# Altium PCB HM-13.PcbDoc
Units mil, origin at the board's own origin, x right, y up, seen from the top; angles counter-clockwise.
Board outline 3182 x 4045 mil, 2 copper layers (Top Layer, Bottom Layer); 120 components, 8 nets, 412 pads, 260 vias.
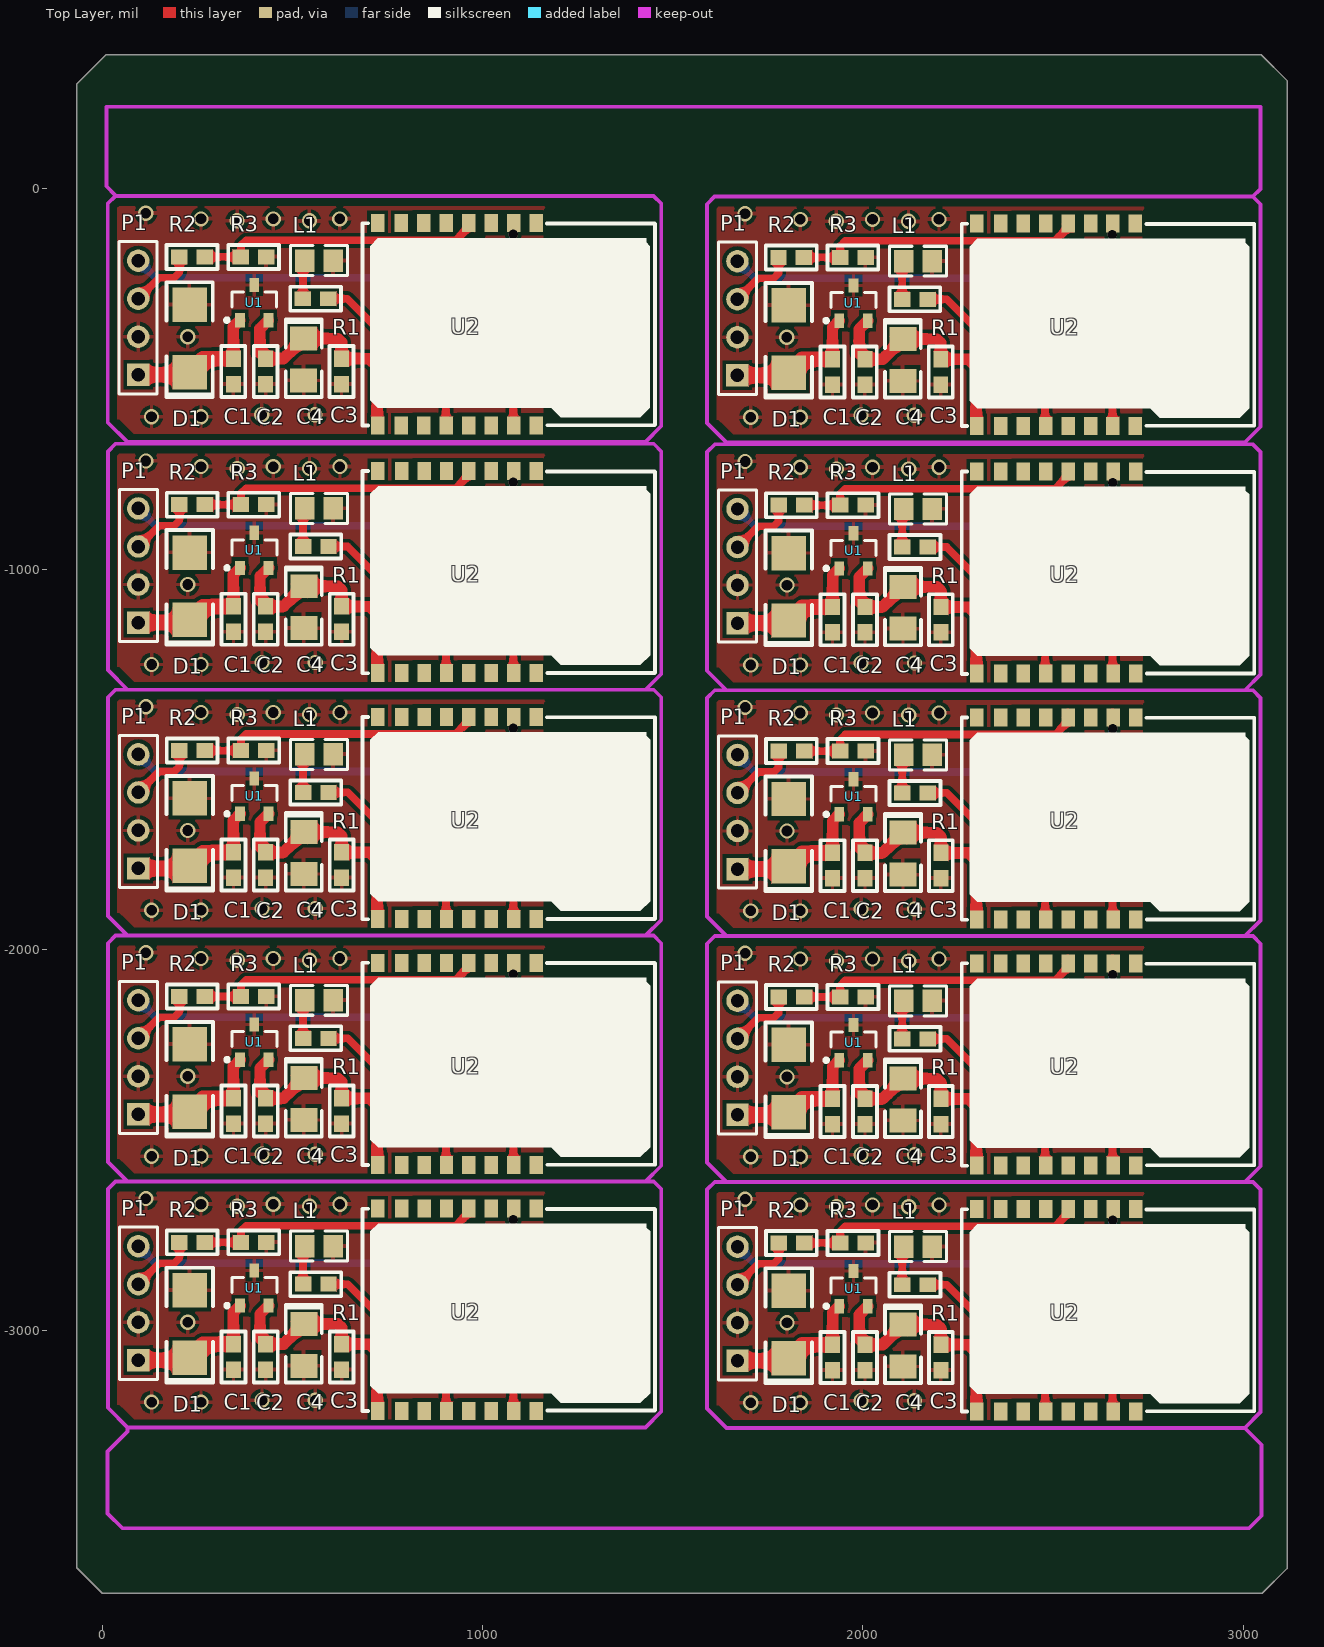
[diagram p0: Top Layer view]
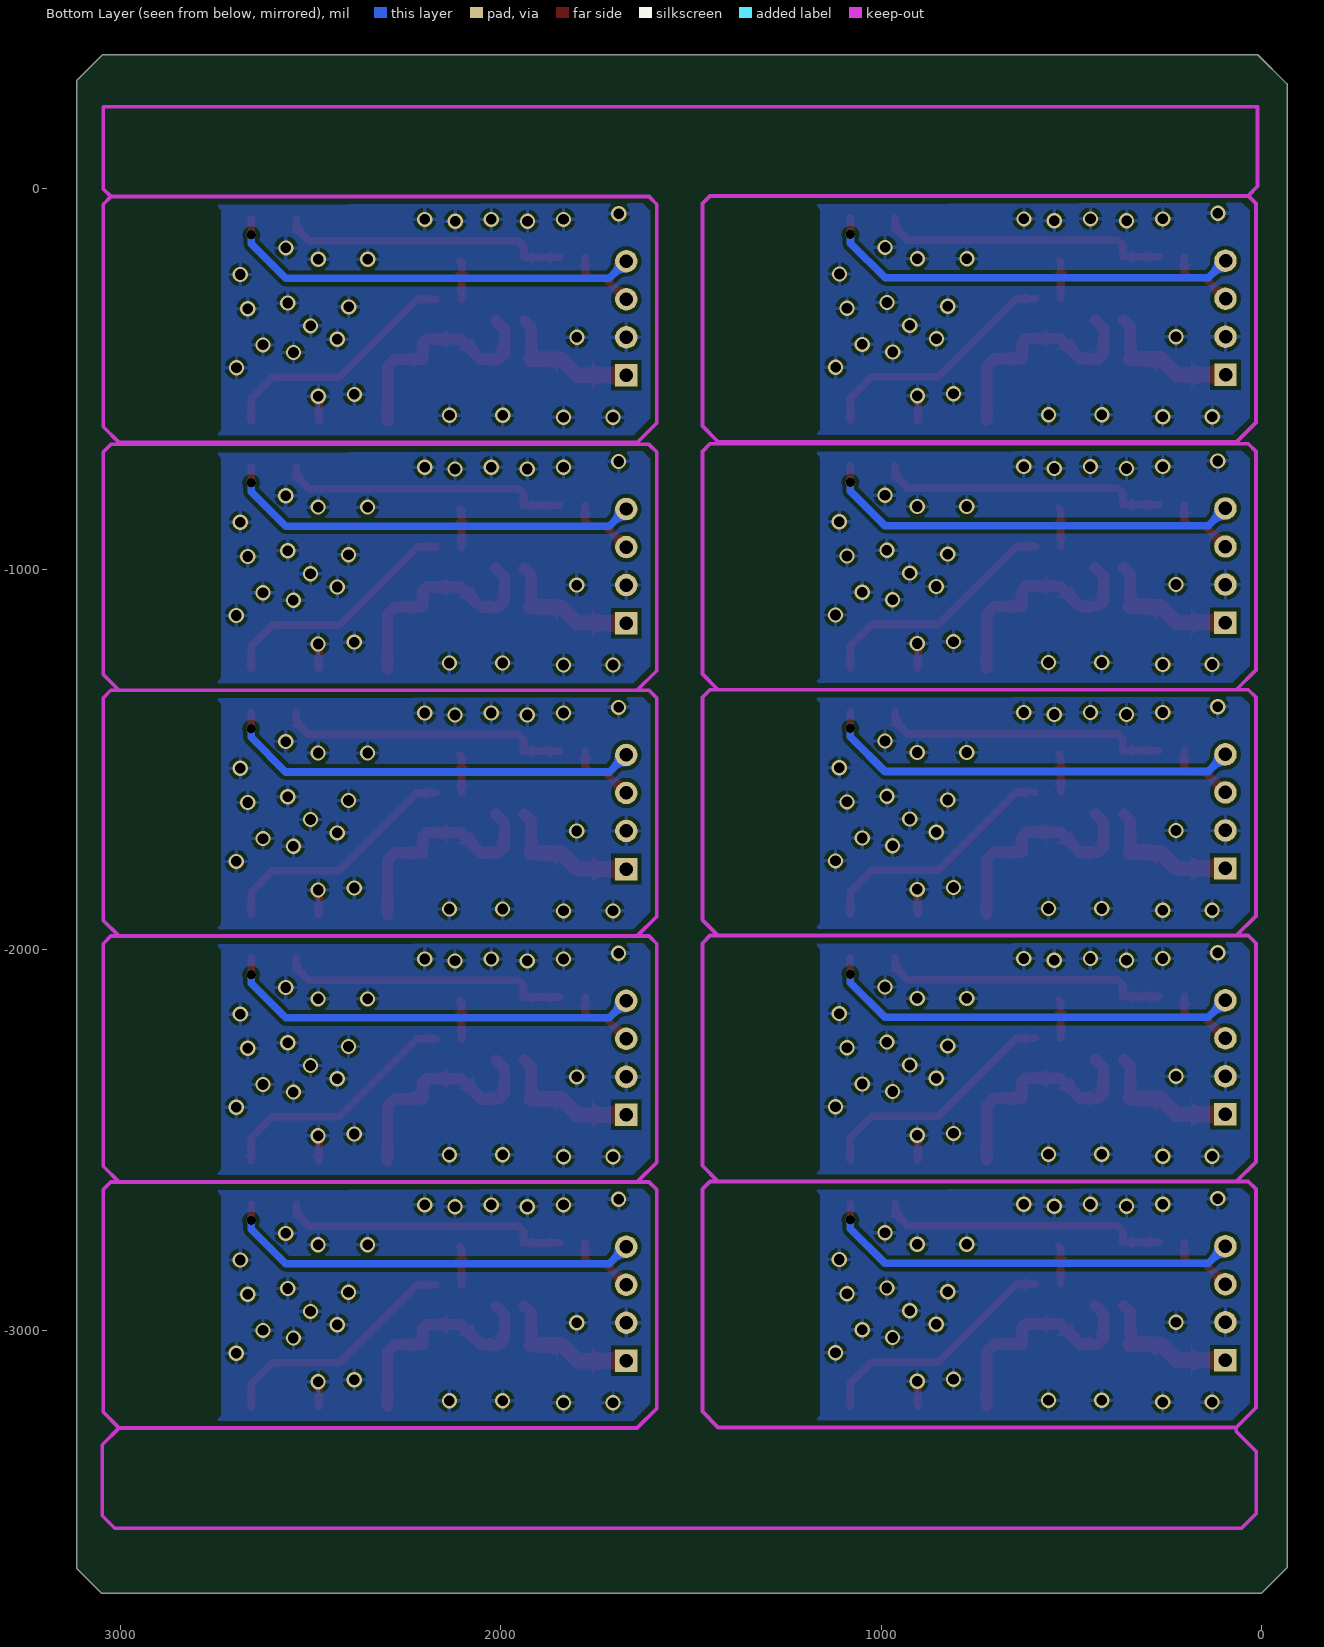
[diagram p1: Bottom Layer view, seen from below]

## Layer stack, top to bottom
Top Solder: solder mask 0.4, Solder Resist, Dk 3.5
Top Layer: signal copper 1.4
Dielectric 1: dielectric 12.6, FR-4, Dk 4.8
Bottom Layer: signal copper 1.4
Bottom Solder: solder mask 0.4, Solder Resist, Dk 3.5

## Board outline
-67,-3625 0,-3692 3050,-3692 3115,-3627 3115,285 3047,353 10,353 -67,276

## Design rules (kind name [scope] priority, off if disabled: settings)
Clearance [All] p1: gap=10
PolygonConnect [All] p1: connectstyle=Relief reliefconductorwidth=10 reliefentries=4 polygonreliefangle="90 Angle" airgapwidth=10
RoutingVias [All] p1: holewidth=28 width=40 viastyle="Through Hole" minholewidth=25 minwidth=15 maxholewidth=28 maxwidth=40
SolderMaskExpansion [All] p1: expansion=4
Width [All] p1: maxlimit=40 minlimit=10 preferedwidth=20
30 further rules are at their usual default settings.

## Components (designator, comment, footprint, x,y, rotation, side; value= is the part's Value field where it differs from the comment)
C1 "1uF" 0603 1920.39,-481.1 r90 top
C1 "1uF" 0603 345.16,-479.71 r90 top
C1 "1uF" 0603 345.39,-1131.1 r90 top
C1 "1uF" 0603 1920.63,-1132.5 r90 top
C1 "1uF" 0603 345.39,-1777.56 r90 top
C1 "1uF" 0603 1920.63,-1778.96 r90 top
C1 "1uF" 0603 345.39,-2424.02 r90 top
C1 "1uF" 0603 1920.63,-2425.41 r90 top
C1 "1uF" 0603 345.39,-3070.47 r90 top
C1 "1uF" 0603 1920.63,-3071.87 r90 top
C2 "1uF" 0603 2005.39,-481.1 r90 top
C2 "1uF" 0603 430.16,-479.71 r90 top
C2 "1uF" 0603 430.39,-1131.1 r90 top
C2 "1uF" 0603 2005.63,-1132.5 r90 top
C2 "1uF" 0603 430.39,-1777.56 r90 top
C2 "1uF" 0603 2005.63,-1778.96 r90 top
C2 "1uF" 0603 430.39,-2424.02 r90 top
C2 "1uF" 0603 2005.63,-2425.41 r90 top
C2 "1uF" 0603 430.39,-3070.47 r90 top
C2 "1uF" 0603 2005.63,-3071.87 r90 top
C3 "0.1uF" 0603 2205,-481.1 r90 top
C3 "0.1uF" 0603 629.77,-479.71 r90 top
C3 "0.1uF" 0603 630,-1131.1 r90 top
C3 "0.1uF" 0603 2205.23,-1132.5 r90 top
C3 "0.1uF" 0603 630,-1777.56 r90 top
C3 "0.1uF" 0603 2205.23,-1778.96 r90 top
C3 "0.1uF" 0603 630,-2424.02 r90 top
C3 "0.1uF" 0603 2205.23,-2425.41 r90 top
C3 "0.1uF" 0603 630,-3070.47 r90 top
C3 "0.1uF" 0603 2205.23,-3071.87 r90 top
C4 "10uF/16V" 1206 2105,-450 r270 top
C4 "10uF/16V" 1206 529.77,-448.6 r270 top
C4 "10uF/16V" 1206 530,-1100 r270 top
C4 "10uF/16V" 1206 2105.23,-1101.4 r270 top
C4 "10uF/16V" 1206 530,-1746.46 r270 top
C4 "10uF/16V" 1206 2105.23,-1747.85 r270 top
C4 "10uF/16V" 1206 530,-2392.91 r270 top
C4 "10uF/16V" 1206 2105.23,-2394.31 r270 top
C4 "10uF/16V" 1206 530,-3039.37 r270 top
C4 "10uF/16V" 1206 2105.23,-3040.77 r270 top
D1 "TVS" DO214-AC 1805,-394.49 r270 top
D1 "TVS" DO214-AC 229.77,-393.09 r270 top
D1 "TVS" DO214-AC 230,-1044.49 r270 top
D1 "TVS" DO214-AC 1805.23,-1045.88 r270 top
D1 "TVS" DO214-AC 230,-1690.94 r270 top
D1 "TVS" DO214-AC 1805.23,-1692.34 r270 top
D1 "TVS" DO214-AC 230,-2337.4 r270 top
D1 "TVS" DO214-AC 1805.23,-2338.8 r270 top
D1 "TVS" DO214-AC 230,-2983.86 r270 top
D1 "TVS" DO214-AC 1805.23,-2985.25 r270 top
L1 "LED" 0805 2145,-190 r0 top
L1 "LED" 0805 569.77,-188.6 r0 top
L1 "LED" 0805 570,-840 r0 top
L1 "LED" 0805 2145.23,-841.4 r0 top
L1 "LED" 0805 570,-1486.46 r0 top
L1 "LED" 0805 2145.23,-1487.85 r0 top
L1 "LED" 0805 570,-2132.91 r0 top
L1 "LED" 0805 2145.23,-2134.31 r0 top
L1 "LED" 0805 570,-2779.37 r0 top
L1 "LED" 0805 2145.23,-2780.77 r0 top
P1 "Header 4" HDR1X4 1670,-490 r90 top
P1 "Header 4" HDR1X4 94.77,-488.6 r90 top
P1 "Header 4" HDR1X4 95,-1140 r90 top
P1 "Header 4" HDR1X4 1670.23,-1141.4 r90 top
P1 "Header 4" HDR1X4 95,-1786.46 r90 top
P1 "Header 4" HDR1X4 1670.23,-1787.85 r90 top
P1 "Header 4" HDR1X4 95,-2432.91 r90 top
P1 "Header 4" HDR1X4 1670.23,-2434.31 r90 top
P1 "Header 4" HDR1X4 95,-3079.37 r90 top
P1 "Header 4" HDR1X4 1670.23,-3080.77 r90 top
R1 "470" 0603 2136.54,-289.61 r180 top
R1 "470" 0603 561.3,-288.21 r180 top
R1 "470" 0603 561.54,-939.61 r180 top
R1 "470" 0603 2136.77,-941 r180 top
R1 "470" 0603 561.54,-1586.06 r180 top
R1 "470" 0603 2136.77,-1587.46 r180 top
R1 "470" 0603 561.54,-2232.52 r180 top
R1 "470" 0603 2136.77,-2233.92 r180 top
R1 "470" 0603 561.54,-2878.98 r180 top
R1 "470" 0603 2136.77,-2880.37 r180 top
R2 "2.2K" 0603 1811.54,-179.61 r180 top
R2 "2.2K" 0603 236.3,-178.21 r180 top
R2 "2.2K" 0603 236.54,-829.61 r180 top
R2 "2.2K" 0603 1811.77,-831 r180 top
R2 "2.2K" 0603 236.54,-1476.06 r180 top
R2 "2.2K" 0603 1811.77,-1477.46 r180 top
R2 "2.2K" 0603 236.54,-2122.52 r180 top
R2 "2.2K" 0603 1811.77,-2123.92 r180 top
R2 "2.2K" 0603 236.54,-2768.98 r180 top
R2 "2.2K" 0603 1811.77,-2770.37 r180 top
R3 "4.7K" 0603 1973.46,-179.61 r180 top
R3 "4.7K" 0603 398.23,-178.21 r180 top
R3 "4.7K" 0603 398.46,-829.61 r180 top
R3 "4.7K" 0603 1973.7,-831 r180 top
R3 "4.7K" 0603 398.46,-1476.06 r180 top
R3 "4.7K" 0603 1973.7,-1477.46 r180 top
R3 "4.7K" 0603 398.46,-2122.52 r180 top
R3 "4.7K" 0603 1973.7,-2123.92 r180 top
R3 "4.7K" 0603 398.46,-2768.98 r180 top
R3 "4.7K" 0603 1973.7,-2770.37 r180 top
U1 "AP7313" AP7313-33SAG-7 1975,-300 r90 top
U1 "AP7313" AP7313-33SAG-7 399.77,-298.6 r90 top
U1 "AP7313" AP7313-33SAG-7 400,-950 r90 top
U1 "AP7313" AP7313-33SAG-7 1975.23,-951.4 r90 top
U1 "AP7313" AP7313-33SAG-7 400,-1596.46 r90 top
U1 "AP7313" AP7313-33SAG-7 1975.23,-1597.85 r90 top
U1 "AP7313" AP7313-33SAG-7 400,-2242.91 r90 top
U1 "AP7313" AP7313-33SAG-7 1975.23,-2244.31 r90 top
U1 "AP7313" AP7313-33SAG-7 400,-2889.37 r90 top
U1 "AP7313" AP7313-33SAG-7 1975.23,-2890.77 r90 top
U2 "HM-13" HM-13 2259.76,-91.4 r270 top
U2 "HM-13" HM-13 684.53,-90 r270 top
U2 "HM-13" HM-13 684.76,-741.4 r270 top
U2 "HM-13" HM-13 2260,-742.79 r270 top
U2 "HM-13" HM-13 684.76,-1387.85 r270 top
U2 "HM-13" HM-13 2260,-1389.25 r270 top
U2 "HM-13" HM-13 684.76,-2034.31 r270 top
U2 "HM-13" HM-13 2260,-2035.71 r270 top
U2 "HM-13" HM-13 684.76,-2680.77 r270 top
U2 "HM-13" HM-13 2260,-2682.16 r270 top

## Footprints (in the part's own frame and the unit in brackets; to place one, negate y for a bottom-side part, rotate by r counter-clockwise, add the part's x,y. Pads: shape width x height; smd on the part's side, far side on the other; paste and mask are expansions set on the pad)
0603 [mm]
  rect 1.1x1 smd: 1(-0.85,0.01) 2(0.85,0.01)
  silkscreen extent -1.7,-0.79 1.7,0.81
0805 [mm]
  rect 1.3x1.5 smd: 1(-0.95,0) 2(0.95,0)
  silkscreen extent -1.9,-1 1.9,1
1206 [mm]
  rect 1.6x1.8 smd: 1(-1.41,0) 2(1.39,0)
  silkscreen extent -2.68,-1.2 2.49,1.2
AP7313-33SAG-7 [mm] "SOT23, 3-Leads, Body 2.90x2.40mm, Pitch 0.95mm, IPC Medium Density"
  rect 0.95x0.65 smd: 1(-1.175,0.95) 2(-1.175,-0.95) 3(1.175,0)
  silkscreen extent -1.3,-1.5 0.7,1.95
DO214-AC [mm]
  rect 2.3x2.3 smd: 1(-2.25,0) 2(2.25,0)
  silkscreen extent -3.75,-1.55 3.9,1.55
HDR1X4 [mm] "Connector; Header; 4 Position"
  rect 1.5x1.5 hole 0.9: 1(0,0)
  round 1.5 hole 0.9: 2(2.54,0) 3(5.08,0) 4(7.62,0)
  silkscreen extent -1.27,-1.27 8.89,1.27
HM-13 [mm]
  rect 1.2x0.9 smd: 1(0,11.6) 2(0,10.1) 3(0,8.6) 4(0,7.1) 5(0,5.6) 6(0,4.1) 7(0,2.6) 8(0,1) 9(13.5,1) 10(13.5,2.6) 11(13.5,4.1) 12(13.5,5.6) 13(13.5,7.1) 14(13.5,8.6) 15(13.5,10.1) 16(13.5,11.6)
  silkscreen extent 0,0 13.51,19.53

## Part data
C1 C1 C1 C1 C1 C1 C1 C1 C1 C1 C2 C2 C2 C2 C2 C2 C2 C2 C2 C2 C3 C3 C3 C3 C3 C3 C3 C3 C3 C3: library part Cap1, "ceramic"
C4 C4 C4 C4 C4 C4 C4 C4 C4 C4: library part Cap3, "aluminum"
D1 D1 D1 D1 D1 D1 D1 D1 D1 D1: library part 6V8A-TVS
P1 P1 P1 P1 P1 P1 P1 P1 P1 P1: "Header, 4-Pin"
R1 R1 R1 R1 R1 R1 R1 R1 R1 R1 R2 R2 R2 R2 R2 R2 R2 R2 R2 R2 R3 R3 R3 R3 R3 R3 R3 R3 R3 R3: library part Res
U1 U1 U1 U1 U1 U1 U1 U1 U1 U1: library part AP7313-33SAG-7

## Free pads (board coordinates)
  round 60 on Keep-Out: 0(120,164) 1(2923,-3446)

## Via types
v1: diameter 40, hole 28, Top Layer to Bottom Layer, 250 vias
v2: diameter 25, hole 25, Top Layer to Bottom Layer, 10 vias

## Nets (pads, with @x,y where several pads share a name; then routed paths per layer and width w, separated by ;. In a path a pad name is that pad's centre, name@x,y a point inside that pad or via, vN(x,y) a via of type N, cw(c..) or ccw(c..) an arc to the next point about the centre after c; other vN are vias at no path point)
3.3V: C2.2@429.77,-446.24 C3.2@629.37,-446.24 C4.1@529.77,-393.09 U1.2@437.17,-344.86 U2.9@723.9,-621.5 | length 629.4
  Top Layer w30: U1.2@437.17,-344.86 414.77,-367.26 414.77,-431.24 429.77,-446.24 476.62,-446.24 529.77,-393.09 619.25,-393.09 629.37,-403.21 629.37,-446.24 702.4,-446.24 722.44,-466.28 U2.9@722.44,-608.6
5V: C1.2@344.77,-446.24 D1.2@229.77,-481.67 P1.1@94.77,-488.6 U1.1@362.36,-344.86 | length 376.2
  Top Layer w30: C1.2@344.77,-446.24 344.77,-362.46 U1.1@362.36,-344.86
  Top Layer w40: P1.1@94.77,-488.6 222.83,-488.6 229.77,-481.67 265.2,-446.24 C1.2@344.77,-446.24
GND: C1.1@344.77,-513.17 C2.1@429.77,-513.17 C3.1@629.37,-513.17 C4.2@529.77,-503.33 D1.1@229.77,-304.51 L1.2@607.17,-188.6 P1.2@94.77,-388.6 R3.1@431.69,-178.6 U1.3@399.77,-252.34 U2.12@905,-621.5 | length 65.5
  Top Layer w20: U2.12@903.54,-608.6 903.54,-544.82 v1(904.77,-543.6)
  other v1: 129.77,-598.6 259.77,-598.6 419.77,-593.6 559.77,-593.6 809.77,-538.6 1119.77,-468.6 969.77,-428.6 1049.77,-408.6 854.77,-393.6 224.77,-388.6 924.77,-358.6 1089.77,-313.6 824.77,-308.6 984.77,-298.6 1109.77,-223.6 774.77,-183.6 904.77,-183.6 989.77,-153.6 354.77,-83.6 544.77,-83.6 259.77,-78.6 449.77,-78.6 624.77,-78.6 114.77,-63.6
NetL1_1: L1.1@532.36,-188.6 R1.2@527.84,-288.6 | length 101.9
  Top Layer w20: R1.2@527.84,-288.6 527.84,-193.13 L1.1@532.36,-188.6
NetR1_1: R1.1@594.77,-288.6 U2.15@1082.17,-621.5 | length 653.1
  Top Layer w20: R1.1@594.77,-288.6 644.77,-288.6 849.77,-493.6 1024.77,-493.6 1080.71,-549.55 U2.15@1080.71,-608.6
NetR2_1: R2.1@269.77,-178.6 R3.2@364.77,-178.6 U2.4@964.06,-90 | length 767
  Top Layer w20: R2.1@269.77,-178.6 364.77,-178.6 364.77,-148.6 378.37,-135 929.62,-135 962.6,-102.02 U2.4@962.6,-77.11
RX: P1.3@94.77,-288.6 R2.2@202.84,-178.6 | length 178.2
  Top Layer w20: P1.3@94.77,-288.6 149.77,-233.6 189.77,-233.6 202.84,-220.53 R2.2@202.84,-178.6
TX: P1.4@94.77,-188.6 U2.2@1082.17,-90 | length 1107.8
  Top Layer w20: v2(1080.71,-119.55) U2.2@1080.71,-77.11
  Bottom Layer w20: P1.4@94.77,-188.6 139.77,-233.6 989.77,-233.6 1080.71,-142.66 v2(1080.71,-119.55)
pads on no net: C1.1@345,-1164.57 C1.1@345,-1811.02 C1.1@345,-2457.48 C1.1@345,-3103.94 C1.1@1920,-514.57 C1.1@1920.23,-1165.96 C1.1@1920.23,-1812.42 C1.1@1920.23,-2458.88 C1.1@1920.23,-3105.33 C1.2@345,-1097.64 C1.2@345,-1744.09 C1.2@345,-2390.55 C1.2@345,-3037.01 C1.2@1920,-447.64 C1.2@1920.23,-1099.03 C1.2@1920.23,-1745.49 C1.2@1920.23,-2391.95 C1.2@1920.23,-3038.4 C2.1@430,-1164.57 C2.1@430,-1811.02 C2.1@430,-2457.48 C2.1@430,-3103.94 C2.1@2005,-514.57 C2.1@2005.23,-1165.96 C2.1@2005.23,-1812.42 C2.1@2005.23,-2458.88 C2.1@2005.23,-3105.33 C2.2@430,-1097.64 C2.2@430,-1744.09 C2.2@430,-2390.55 C2.2@430,-3037.01 C2.2@2005,-447.64 C2.2@2005.23,-1099.03 C2.2@2005.23,-1745.49 C2.2@2005.23,-2391.95 C2.2@2005.23,-3038.4 C3.1@629.61,-1164.57 C3.1@629.61,-1811.02 C3.1@629.61,-2457.48 C3.1@629.61,-3103.94 C3.1@2204.61,-514.57 C3.1@2204.84,-1165.96 C3.1@2204.84,-1812.42 C3.1@2204.84,-2458.88 C3.1@2204.84,-3105.33 C3.2@629.61,-1097.64 C3.2@629.61,-1744.09 C3.2@629.61,-2390.55 C3.2@629.61,-3037.01 C3.2@2204.61,-447.64 C3.2@2204.84,-1099.03 C3.2@2204.84,-1745.49 C3.2@2204.84,-2391.95 C3.2@2204.84,-3038.4 C4.1@530,-1044.49 C4.1@530,-1690.94 C4.1@530,-2337.4 C4.1@530,-2983.86 C4.1@2105,-394.49 C4.1@2105.23,-1045.88 C4.1@2105.23,-1692.34 C4.1@2105.23,-2338.8 C4.1@2105.23,-2985.25 C4.2@530,-1154.72 C4.2@530,-1801.18 C4.2@530,-2447.64 C4.2@530,-3094.09 C4.2@2105,-504.72 C4.2@2105.23,-1156.12 C4.2@2105.23,-1802.58 C4.2@2105.23,-2449.03 C4.2@2105.23,-3095.49 D1.1@230,-955.91 D1.1@230,-1602.36 D1.1@230,-2248.82 D1.1@230,-2895.28 D1.1@1805,-305.91 D1.1@1805.23,-957.3 D1.1@1805.23,-1603.76 D1.1@1805.23,-2250.22 D1.1@1805.23,-2896.67 D1.2@230,-1133.07 D1.2@230,-1779.53 D1.2@230,-2425.98 D1.2@230,-3072.44 D1.2@1805,-483.07 D1.2@1805.23,-1134.47 D1.2@1805.23,-1780.92 D1.2@1805.23,-2427.38 D1.2@1805.23,-3073.84 L1.1@532.6,-840 L1.1@532.6,-1486.46 L1.1@532.6,-2132.91 L1.1@532.6,-2779.37 L1.1@2107.6,-190 L1.1@2107.83,-841.4 L1.1@2107.83,-1487.85 L1.1@2107.83,-2134.31 L1.1@2107.83,-2780.77 L1.2@607.4,-840 L1.2@607.4,-1486.46 L1.2@607.4,-2132.91 L1.2@607.4,-2779.37 L1.2@2182.4,-190 L1.2@2182.64,-841.4 L1.2@2182.64,-1487.85 L1.2@2182.64,-2134.31 L1.2@2182.64,-2780.77 P1.1@95,-1140 P1.1@95,-1786.46 P1.1@95,-2432.91 P1.1@95,-3079.37 P1.1@1670,-490 P1.1@1670.23,-1141.4 P1.1@1670.23,-1787.85 P1.1@1670.23,-2434.31 P1.1@1670.23,-3080.77 P1.2@95,-1040 P1.2@95,-1686.46 P1.2@95,-2332.91 P1.2@95,-2979.37 P1.2@1670,-390 P1.2@1670.23,-1041.4 P1.2@1670.23,-1687.85 P1.2@1670.23,-2334.31 P1.2@1670.23,-2980.77 P1.3@95,-940 P1.3@95,-1586.46 P1.3@95,-2232.91 P1.3@95,-2879.37 P1.3@1670,-290 P1.3@1670.23,-941.4 P1.3@1670.23,-1587.85 P1.3@1670.23,-2234.31 P1.3@1670.23,-2880.77 P1.4@95,-840 P1.4@95,-1486.46 P1.4@95,-2132.91 P1.4@95,-2779.37 P1.4@1670,-190 P1.4@1670.23,-841.4 P1.4@1670.23,-1487.85 P1.4@1670.23,-2134.31 P1.4@1670.23,-2780.77 R1.1@595,-940 R1.1@595,-1586.46 R1.1@595,-2232.91 R1.1@595,-2879.37 R1.1@2170,-290 R1.1@2170.23,-941.4 R1.1@2170.23,-1587.85 R1.1@2170.23,-2234.31 R1.1@2170.23,-2880.77 R1.2@528.07,-940 R1.2@528.07,-1586.46 R1.2@528.07,-2232.91 R1.2@528.07,-2879.37 R1.2@2103.07,-290 R1.2@2103.31,-941.4 R1.2@2103.31,-1587.85 R1.2@2103.31,-2234.31 R1.2@2103.31,-2880.77 R2.1@270,-830 R2.1@270,-1476.46 R2.1@270,-2122.91 R2.1@270,-2769.37 R2.1@1845,-180 R2.1@1845.23,-831.4 R2.1@1845.23,-1477.85 R2.1@1845.23,-2124.31 R2.1@1845.23,-2770.77 R2.2@203.07,-830 R2.2@203.07,-1476.46 R2.2@203.07,-2122.91 R2.2@203.07,-2769.37 R2.2@1778.07,-180 R2.2@1778.31,-831.4 R2.2@1778.31,-1477.85 R2.2@1778.31,-2124.31 R2.2@1778.31,-2770.77 R3.1@431.93,-830 R3.1@431.93,-1476.46 R3.1@431.93,-2122.91 R3.1@431.93,-2769.37 R3.1@2006.93,-180 R3.1@2007.16,-831.4 R3.1@2007.16,-1477.85 R3.1@2007.16,-2124.31 R3.1@2007.16,-2770.77 R3.2@365,-830 R3.2@365,-1476.46 R3.2@365,-2122.91 R3.2@365,-2769.37 R3.2@1940,-180 R3.2@1940.23,-831.4 R3.2@1940.23,-1477.85 R3.2@1940.23,-2124.31 R3.2@1940.23,-2770.77 U1.1@362.6,-996.26 U1.1@362.6,-1642.72 U1.1@362.6,-2289.17 U1.1@362.6,-2935.63 U1.1@1937.6,-346.26 U1.1@1937.83,-997.66 U1.1@1937.83,-1644.11 U1.1@1937.83,-2290.57 U1.1@1937.83,-2937.03 U1.2@437.4,-996.26 U1.2@437.4,-1642.72 U1.2@437.4,-2289.17 U1.2@437.4,-2935.63 U1.2@2012.4,-346.26 U1.2@2012.64,-997.66 U1.2@2012.64,-1644.11 U1.2@2012.64,-2290.57 U1.2@2012.64,-2937.03 U1.3@400,-903.74 U1.3@400,-1550.2 U1.3@400,-2196.65 U1.3@400,-2843.11 U1.3@1975,-253.74 U1.3@1975.23,-905.14 U1.3@1975.23,-1551.59 U1.3@1975.23,-2198.05 U1.3@1975.23,-2844.51 U2.1 U2.2@1082.4,-741.4 U2.2@1082.4,-1387.85 U2.2@1082.4,-2034.31 U2.2@1082.4,-2680.77 U2.2@2657.4,-91.4 U2.2@2657.63,-742.79 U2.2@2657.63,-1389.25 U2.2@2657.63,-2035.71 U2.2@2657.63,-2682.16 U2.3 U2.4@964.29,-741.4 U2.4@964.29,-1387.85 U2.4@964.29,-2034.31 U2.4@964.29,-2680.77 U2.4@2539.29,-91.4 U2.4@2539.52,-742.79 U2.4@2539.52,-1389.25 U2.4@2539.52,-2035.71 U2.4@2539.52,-2682.16 U2.5 U2.6 U2.7 U2.8 U2.9@724.13,-1272.89 U2.9@724.13,-1919.35 U2.9@724.13,-2565.81 U2.9@724.13,-3212.26 U2.9@2299.13,-622.89 U2.9@2299.37,-1274.29 U2.9@2299.37,-1920.75 U2.9@2299.37,-2567.2 U2.9@2299.37,-3213.66 U2.10 U2.11 U2.12@905.23,-1272.89 U2.12@905.23,-1919.35 U2.12@905.23,-2565.81 U2.12@905.23,-3212.26 U2.12@2480.23,-622.89 U2.12@2480.47,-1274.29 U2.12@2480.47,-1920.75 U2.12@2480.47,-2567.2 U2.12@2480.47,-3213.66 U2.13 U2.14 U2.15@1082.4,-1272.89 U2.15@1082.4,-1919.35 U2.15@1082.4,-2565.81 U2.15@1082.4,-3212.26 U2.15@2657.4,-622.89 U2.15@2657.63,-1274.29 U2.15@2657.63,-1920.75 U2.15@2657.63,-2567.2 U2.15@2657.63,-3213.66 U2.16
copper on no net: | length 34912.2
  Top Layer w20: 95,-2879.37 150,-2824.37 190,-2824.37 203.07,-2811.3 203.07,-2769.37 ; 95,-2232.91 150,-2177.91 190,-2177.91 203.07,-2164.84 203.07,-2122.91 ; 95,-1586.46 150,-1531.46 190,-1531.46 203.07,-1518.39 203.07,-1476.46 ; 95,-940 150,-885 190,-885 203.07,-871.93 203.07,-830 ; 270,-2769.37 365,-2769.37 365,-2739.37 378.6,-2725.77 929.86,-2725.77 962.83,-2692.79 962.83,-2667.87 ; 270,-2122.91 365,-2122.91 365,-2092.91 378.6,-2079.31 929.86,-2079.31 962.83,-2046.33 962.83,-2021.42 ; 270,-1476.46 365,-1476.46 365,-1446.46 378.6,-1432.85 929.86,-1432.85 962.83,-1399.88 962.83,-1374.96 ; 270,-830 365,-830 365,-800 378.6,-786.4 929.86,-786.4 962.83,-753.42 962.83,-728.5 ; 528.07,-2879.37 528.07,-2783.9 532.6,-2779.37 ; 528.07,-2232.91 528.07,-2137.44 532.6,-2132.91 ; 528.07,-1586.46 528.07,-1490.98 532.6,-1486.46 ; 528.07,-940 528.07,-844.53 532.6,-840 ; 595,-2879.37 645,-2879.37 850,-3084.37 1025,-3084.37 1080.94,-3140.31 1080.94,-3199.37 ; 595,-2232.91 645,-2232.91 850,-2437.91 1025,-2437.91 1080.94,-2493.86 1080.94,-2552.91 ; 595,-1586.46 645,-1586.46 850,-1791.46 1025,-1791.46 1080.94,-1847.4 1080.94,-1906.46 ; 595,-940 645,-940 850,-1145 1025,-1145 1080.94,-1200.94 1080.94,-1260 ; 903.78,-3199.37 903.78,-3135.59 v1(905,-3134.37) ; 903.78,-2552.91 903.78,-2489.13 v1(905,-2487.91) ; 903.78,-1906.46 903.78,-1842.68 v1(905,-1841.46) ; 903.78,-1260 903.78,-1196.22 v1(905,-1195) ; v2(1080.94,-2710.31) 1080.94,-2667.87 ; v2(1080.94,-2063.86) 1080.94,-2021.42 ; v2(1080.94,-1417.4) 1080.94,-1374.96 ; v2(1080.94,-770.94) 1080.94,-728.5 ; 1670,-290 1725,-235 1765,-235 1778.07,-221.93 1778.07,-180 ; 1670.23,-2880.77 1725.23,-2825.77 1765.23,-2825.77 1778.31,-2812.7 1778.31,-2770.77 ; 1670.23,-2234.31 1725.23,-2179.31 1765.23,-2179.31 1778.31,-2166.24 1778.31,-2124.31 ; 1670.23,-1587.85 1725.23,-1532.85 1765.23,-1532.85 1778.31,-1519.78 1778.31,-1477.85 ; 1670.23,-941.4 1725.23,-886.4 1765.23,-886.4 1778.31,-873.33 1778.31,-831.4 ; 1845,-180 1940,-180 1940,-150 1953.6,-136.4 2504.86,-136.4 2537.83,-103.42 2537.83,-78.5 ; 1845.23,-2770.77 1940.23,-2770.77 1940.23,-2740.77 1953.84,-2727.16 2505.09,-2727.16 2538.07,-2694.19 2538.07,-2669.27 ; 1845.23,-2124.31 1940.23,-2124.31 1940.23,-2094.31 1953.84,-2080.71 2505.09,-2080.71 2538.07,-2047.73 2538.07,-2022.81 ; 1845.23,-1477.85 1940.23,-1477.85 1940.23,-1447.85 1953.84,-1434.25 2505.09,-1434.25 2538.07,-1401.27 2538.07,-1376.36 ; 1845.23,-831.4 1940.23,-831.4 1940.23,-801.4 1953.84,-787.79 2505.09,-787.79 2538.07,-754.82 2538.07,-729.9 ; 2103.07,-290 2103.07,-194.53 2107.6,-190 ; 2103.31,-2880.77 2103.31,-2785.29 2107.83,-2780.77 ; 2103.31,-2234.31 2103.31,-2138.84 2107.83,-2134.31 ; 2103.31,-1587.85 2103.31,-1492.38 2107.83,-1487.85 ; 2103.31,-941.4 2103.31,-845.92 2107.83,-841.4 ; 2170,-290 2220,-290 2425,-495 2600,-495 2655.94,-550.94 2655.94,-610 ; 2170.23,-2880.77 2220.23,-2880.77 2425.23,-3085.77 2600.23,-3085.77 2656.18,-3141.71 2656.18,-3200.77 ; 2170.23,-2234.31 2220.23,-2234.31 2425.23,-2439.31 2600.23,-2439.31 2656.18,-2495.25 2656.18,-2554.31 ; 2170.23,-1587.85 2220.23,-1587.85 2425.23,-1792.85 2600.23,-1792.85 2656.18,-1848.8 2656.18,-1907.85 ; 2170.23,-941.4 2220.23,-941.4 2425.23,-1146.4 2600.23,-1146.4 2656.18,-1202.34 2656.18,-1261.4 ; 2478.78,-610 2478.78,-546.22 v1(2480,-545) ; 2479.01,-3200.77 2479.01,-3136.99 v1(2480.23,-3135.77) ; 2479.01,-2554.31 2479.01,-2490.53 v1(2480.23,-2489.31) ; 2479.01,-1907.85 2479.01,-1844.07 v1(2480.23,-1842.85) ; 2479.01,-1261.4 2479.01,-1197.62 v1(2480.23,-1196.4) ; v2(2655.94,-120.94) 2655.94,-78.5 ; v2(2656.18,-2711.71) 2656.18,-2669.27 ; v2(2656.18,-2065.25) 2656.18,-2022.81 ; v2(2656.18,-1418.8) 2656.18,-1376.36 ; v2(2656.18,-772.34) 2656.18,-729.9
  Top Layer w30: 345,-3037.01 345,-2953.23 362.6,-2935.63 ; 345,-2390.55 345,-2306.77 362.6,-2289.17 ; 345,-1744.09 345,-1660.31 362.6,-1642.72 ; 345,-1097.64 345,-1013.86 362.6,-996.26 ; 437.4,-2935.63 415,-2958.03 415,-3022.01 430,-3037.01 476.85,-3037.01 530,-2983.86 619.49,-2983.86 629.61,-2993.98 629.61,-3037.01 702.64,-3037.01 722.68,-3057.05 722.68,-3199.37 ; 437.4,-2289.17 415,-2311.57 415,-2375.55 430,-2390.55 476.85,-2390.55 530,-2337.4 619.49,-2337.4 629.61,-2347.52 629.61,-2390.55 702.64,-2390.55 722.68,-2410.59 722.68,-2552.91 ; 437.4,-1642.72 415,-1665.12 415,-1729.09 430,-1744.09 476.85,-1744.09 530,-1690.94 619.49,-1690.94 629.61,-1701.06 629.61,-1744.09 702.64,-1744.09 722.68,-1764.13 722.68,-1906.46 ; 437.4,-996.26 415,-1018.66 415,-1082.64 430,-1097.64 476.85,-1097.64 530,-1044.49 619.49,-1044.49 629.61,-1054.61 629.61,-1097.64 702.64,-1097.64 722.68,-1117.68 722.68,-1260 ; 1920,-447.64 1920,-363.86 1937.6,-346.26 ; 1920.23,-3038.4 1920.23,-2954.62 1937.83,-2937.03 ; 1920.23,-2391.95 1920.23,-2308.17 1937.83,-2290.57 ; 1920.23,-1745.49 1920.23,-1661.71 1937.83,-1644.11 ; 1920.23,-1099.03 1920.23,-1015.25 1937.83,-997.66 ; 2012.4,-346.26 1990,-368.66 1990,-432.64 2005,-447.64 2051.85,-447.64 2105,-394.49 2194.49,-394.49 2204.61,-404.61 2204.61,-447.64 2277.64,-447.64 2297.68,-467.68 2297.68,-610 ; 2012.64,-2937.03 1990.23,-2959.43 1990.23,-3023.4 2005.23,-3038.4 2052.09,-3038.4 2105.23,-2985.25 2194.72,-2985.25 2204.84,-2995.37 2204.84,-3038.4 2277.87,-3038.4 2297.91,-3058.44 2297.91,-3200.77 ; 2012.64,-2290.57 1990.23,-2312.97 1990.23,-2376.95 2005.23,-2391.95 2052.09,-2391.95 2105.23,-2338.8 2194.72,-2338.8 2204.84,-2348.92 2204.84,-2391.95 2277.87,-2391.95 2297.91,-2411.99 2297.91,-2554.31 ; 2012.64,-1644.11 1990.23,-1666.51 1990.23,-1730.49 2005.23,-1745.49 2052.09,-1745.49 2105.23,-1692.34 2194.72,-1692.34 2204.84,-1702.46 2204.84,-1745.49 2277.87,-1745.49 2297.91,-1765.53 2297.91,-1907.85 ; 2012.64,-997.66 1990.23,-1020.06 1990.23,-1084.03 2005.23,-1099.03 2052.09,-1099.03 2105.23,-1045.88 2194.72,-1045.88 2204.84,-1056 2204.84,-1099.03 2277.87,-1099.03 2297.91,-1119.07 2297.91,-1261.4
  Top Layer w40: 95,-3079.37 223.07,-3079.37 230,-3072.44 265.43,-3037.01 345,-3037.01 ; 95,-2432.91 223.07,-2432.91 230,-2425.98 265.43,-2390.55 345,-2390.55 ; 95,-1786.46 223.07,-1786.46 230,-1779.53 265.43,-1744.09 345,-1744.09 ; 95,-1140 223.07,-1140 230,-1133.07 265.43,-1097.64 345,-1097.64 ; 1670,-490 1798.07,-490 1805,-483.07 1840.43,-447.64 1920,-447.64 ; 1670.23,-3080.77 1798.3,-3080.77 1805.23,-3073.84 1840.67,-3038.4 1920.23,-3038.4 ; 1670.23,-2434.31 1798.3,-2434.31 1805.23,-2427.38 1840.67,-2391.95 1920.23,-2391.95 ; 1670.23,-1787.85 1798.3,-1787.85 1805.23,-1780.92 1840.67,-1745.49 1920.23,-1745.49 ; 1670.23,-1141.4 1798.3,-1141.4 1805.23,-1134.47 1840.67,-1099.03 1920.23,-1099.03
  Bottom Layer w20: 95,-2779.37 140,-2824.37 990,-2824.37 1080.94,-2733.43 v2(1080.94,-2710.31) ; 95,-2132.91 140,-2177.91 990,-2177.91 1080.94,-2086.97 v2(1080.94,-2063.86) ; 95,-1486.46 140,-1531.46 990,-1531.46 1080.94,-1440.51 v2(1080.94,-1417.4) ; 95,-840 140,-885 990,-885 1080.94,-794.06 v2(1080.94,-770.94) ; 1670,-190 1715,-235 2565,-235 2655.94,-144.06 v2(2655.94,-120.94) ; 1670.23,-2780.77 1715.23,-2825.77 2565.23,-2825.77 2656.18,-2734.82 v2(2656.18,-2711.71) ; 1670.23,-2134.31 1715.23,-2179.31 2565.23,-2179.31 2656.18,-2088.36 v2(2656.18,-2065.25) ; 1670.23,-1487.85 1715.23,-1532.85 2565.23,-1532.85 2656.18,-1441.91 v2(2656.18,-1418.8) ; 1670.23,-841.4 1715.23,-886.4 2565.23,-886.4 2656.18,-795.45 v2(2656.18,-772.34)
  other v1: 1705.23,-3190.77 1835.23,-3190.77 130,-3189.37 260,-3189.37 1995.23,-3185.77 2135.23,-3185.77 420,-3184.37 560,-3184.37 2385.23,-3130.77 810,-3129.37 2695.23,-3060.77 1120,-3059.37 2545.23,-3020.77 970,-3019.37 2625.23,-3000.77 1050,-2999.37 2430.23,-2985.77 855,-2984.37 1800.23,-2980.77 225,-2979.37 2500.23,-2950.77 925,-2949.37 2665.23,-2905.77 1090,-2904.37 2400.23,-2900.77 825,-2899.37 2560.23,-2890.77 985,-2889.37 2685.23,-2815.77 1110,-2814.37 2350.23,-2775.77 2480.23,-2775.77 775,-2774.37 905,-2774.37 2565.23,-2745.77 990,-2744.37 1930.23,-2675.77 2120.23,-2675.77 355,-2674.37 545,-2674.37 1835.23,-2670.77 2025.23,-2670.77 2200.23,-2670.77 260,-2669.37 450,-2669.37 625,-2669.37 1690.23,-2655.77 115,-2654.37 1705.23,-2544.31 1835.23,-2544.31 130,-2542.91 260,-2542.91 1995.23,-2539.31 2135.23,-2539.31 420,-2537.91 560,-2537.91 2385.23,-2484.31 810,-2482.91 2695.23,-2414.31 1120,-2412.91 2545.23,-2374.31 970,-2372.91 2625.23,-2354.31 1050,-2352.91 2430.23,-2339.31 855,-2337.91 1800.23,-2334.31 225,-2332.91 2500.23,-2304.31 925,-2302.91 2665.23,-2259.31 1090,-2257.91 2400.23,-2254.31 825,-2252.91 2560.23,-2244.31 985,-2242.91 2685.23,-2169.31 1110,-2167.91 2350.23,-2129.31 2480.23,-2129.31 775,-2127.91 905,-2127.91 2565.23,-2099.31 990,-2097.91 1930.23,-2029.31 2120.23,-2029.31 355,-2027.91 545,-2027.91 1835.23,-2024.31 2025.23,-2024.31 2200.23,-2024.31 260,-2022.91 450,-2022.91 625,-2022.91 1690.23,-2009.31 115,-2007.91 1705.23,-1897.85 1835.23,-1897.85 130,-1896.46 260,-1896.46 1995.23,-1892.85 2135.23,-1892.85 420,-1891.46 560,-1891.46 2385.23,-1837.85 810,-1836.46 2695.23,-1767.85 1120,-1766.46 2545.23,-1727.85 970,-1726.46 2625.23,-1707.85 1050,-1706.46 2430.23,-1692.85 855,-1691.46 1800.23,-1687.85 225,-1686.46 2500.23,-1657.85 925,-1656.46 2665.23,-1612.85 1090,-1611.46 2400.23,-1607.85 825,-1606.46 2560.23,-1597.85 985,-1596.46 2685.23,-1522.85 1110,-1521.46 2350.23,-1482.85 2480.23,-1482.85 775,-1481.46 905,-1481.46 2565.23,-1452.85 990,-1451.46 1930.23,-1382.85 2120.23,-1382.85 355,-1381.46 545,-1381.46 1835.23,-1377.85 2025.23,-1377.85 2200.23,-1377.85 260,-1376.46 450,-1376.46 625,-1376.46 1690.23,-1362.85 115,-1361.46 1705.23,-1251.4 1835.23,-1251.4 130,-1250 260,-1250 1995.23,-1246.4 2135.23,-1246.4 420,-1245 560,-1245 2385.23,-1191.4 810,-1190 2695.23,-1121.4 1120,-1120 2545.23,-1081.4 970,-1080 2625.23,-1061.4 1050,-1060 2430.23,-1046.4 855,-1045 1800.23,-1041.4 225,-1040 2500.23,-1011.4 925,-1010 2665.23,-966.4 1090,-965 2400.23,-961.4 825,-960 2560.23,-951.4 985,-950 2685.23,-876.4 1110,-875 2350.23,-836.4 2480.23,-836.4 775,-835 905,-835 2565.23,-806.4 990,-805 1930.23,-736.4 2120.23,-736.4 355,-735 545,-735 1835.23,-731.4 2025.23,-731.4 2200.23,-731.4 260,-730 450,-730 625,-730 1690.23,-716.4 115,-715 1705,-600 1835,-600 1995,-595 2135,-595 2385,-540 2695,-470 2545,-430 2625,-410 2430,-395 1800,-390 2500,-360 2665,-315 2400,-310 2560,-300 2685,-225 2350,-185 2480,-185 2565,-155 1930,-85 2120,-85 1835,-80 2025,-80 2200,-80 1690,-65

## Polygon pours and split planes (outlines as drawn)
no net on Bottom Layer "GND" (solid, remove dead copper, pour order 60): 2766.44,-41.53 3016.44,-41.53 3031.44,-56.53 3031.44,-616.53 3001.44,-646.53 2761.44,-646.53 2760.04,-647.92 1651.67,-647.92 1611.67,-607.92 1606.67,-602.92 1606.67,-202.92 1606.67,-57.92 1626.67,-37.92
GND on Bottom Layer "GND" (solid, remove dead copper, pour order 52): 1191.2,-40.13 1441.2,-40.13 1456.2,-55.13 1456.2,-615.13 1426.2,-645.13 1186.2,-645.13 1184.81,-646.53 76.44,-646.53 36.44,-606.53 31.44,-601.53 31.44,-201.53 31.44,-56.53 51.44,-36.53
no net on Bottom Layer "GND" (solid, remove dead copper, pour order 64): 1191.44,-691.53 1441.44,-691.53 1456.44,-706.53 1456.44,-1266.53 1426.44,-1296.53 1186.44,-1296.53 1185.04,-1297.92 76.67,-1297.92 36.67,-1257.92 31.67,-1252.92 31.67,-852.92 31.67,-707.92 51.67,-687.92
no net on Bottom Layer "GND" (solid, remove dead copper, pour order 66): 2766.67,-692.92 3016.67,-692.92 3031.67,-707.92 3031.67,-1267.92 3001.67,-1297.92 2761.67,-1297.92 2760.28,-1299.32 1651.91,-1299.32 1611.91,-1259.32 1606.91,-1254.32 1606.91,-854.32 1606.91,-709.32 1626.91,-689.32
no net on Bottom Layer "GND" (solid, remove dead copper, pour order 72): 1191.44,-1337.98 1441.44,-1337.98 1456.44,-1352.98 1456.44,-1912.98 1426.44,-1942.98 1186.44,-1942.98 1185.04,-1944.38 76.67,-1944.38 36.67,-1904.38 31.67,-1899.38 31.67,-1499.38 31.67,-1354.38 51.67,-1334.38
no net on Bottom Layer "GND" (solid, remove dead copper, pour order 74): 2766.67,-1339.38 3016.67,-1339.38 3031.67,-1354.38 3031.67,-1914.38 3001.67,-1944.38 2761.67,-1944.38 2760.28,-1945.78 1651.91,-1945.78 1611.91,-1905.78 1606.91,-1900.78 1606.91,-1500.78 1606.91,-1355.78 1626.91,-1335.78
no net on Bottom Layer "GND" (solid, remove dead copper, pour order 80): 1191.44,-1984.44 1441.44,-1984.44 1456.44,-1999.44 1456.44,-2559.44 1426.44,-2589.44 1186.44,-2589.44 1185.04,-2590.84 76.67,-2590.84 36.67,-2550.84 31.67,-2545.84 31.67,-2145.84 31.67,-2000.84 51.67,-1980.84
no net on Bottom Layer "GND" (solid, remove dead copper, pour order 82): 2766.67,-1985.84 3016.67,-1985.84 3031.67,-2000.84 3031.67,-2560.84 3001.67,-2590.84 2761.67,-2590.84 2760.28,-2592.23 1651.91,-2592.23 1611.91,-2552.23 1606.91,-2547.23 1606.91,-2147.23 1606.91,-2002.23 1626.91,-1982.23
no net on Bottom Layer "GND" (solid, remove dead copper, pour order 88): 1191.44,-2630.9 1441.44,-2630.9 1456.44,-2645.9 1456.44,-3205.9 1426.44,-3235.9 1186.44,-3235.9 1185.04,-3237.29 76.67,-3237.29 36.67,-3197.29 31.67,-3192.29 31.67,-2792.29 31.67,-2647.29 51.67,-2627.29
no net on Bottom Layer "GND" (solid, remove dead copper, pour order 90): 2766.67,-2632.29 3016.67,-2632.29 3031.67,-2647.29 3031.67,-3207.29 3001.67,-3237.29 2761.67,-3237.29 2760.28,-3238.69 1651.91,-3238.69 1611.91,-3198.69 1606.91,-3193.69 1606.91,-2793.69 1606.91,-2648.69 1626.91,-2628.69
no net on Top Layer "GND" (solid, remove dead copper, pour order 62): 1615.23,-51.4 1620.23,-46.4 3008.6,-46.4 3015,-40 3030.23,-55.23 3030.23,-76.4 3030.23,-614.77 3000,-645 2760,-645 1658.84,-645 1635.23,-621.4 1620.23,-606.4 1615.23,-606.4
GND on Top Layer "GND" (solid, remove dead copper, pour order 54): 40,-50 45,-45 1433.37,-45 1439.77,-38.6 1455,-53.84 1455,-75 1455,-613.37 1424.77,-643.6 1184.77,-643.6 83.6,-643.6 60,-620 45,-605 40,-605
no net on Top Layer "GND" (solid, remove dead copper, pour order 68): 40.23,-701.4 45.23,-696.4 1433.6,-696.4 1440,-690 1455.23,-705.23 1455.23,-726.4 1455.23,-1264.77 1425,-1295 1185,-1295 83.84,-1295 60.23,-1271.4 45.23,-1256.4 40.23,-1256.4
no net on Top Layer "GND" (solid, remove dead copper, pour order 70): 1615.47,-702.79 1620.47,-697.79 3008.84,-697.79 3015.23,-691.4 3030.47,-706.63 3030.47,-727.79 3030.47,-1266.16 3000.23,-1296.4 2760.23,-1296.4 1659.07,-1296.4 1635.47,-1272.79 1620.47,-1257.79 1615.47,-1257.79
no net on Top Layer "GND" (solid, remove dead copper, pour order 76): 40.23,-1347.85 45.23,-1342.85 1433.6,-1342.85 1440,-1336.46 1455.23,-1351.69 1455.23,-1372.85 1455.23,-1911.22 1425,-1941.46 1185,-1941.46 83.84,-1941.46 60.23,-1917.85 45.23,-1902.85 40.23,-1902.85
no net on Top Layer "GND" (solid, remove dead copper, pour order 78): 1615.47,-1349.25 1620.47,-1344.25 3008.84,-1344.25 3015.23,-1337.85 3030.47,-1353.09 3030.47,-1374.25 3030.47,-1912.62 3000.23,-1942.85 2760.23,-1942.85 1659.07,-1942.85 1635.47,-1919.25 1620.47,-1904.25 1615.47,-1904.25
no net on Top Layer "GND" (solid, remove dead copper, pour order 84): 40.23,-1994.31 45.23,-1989.31 1433.6,-1989.31 1440,-1982.91 1455.23,-1998.15 1455.23,-2019.31 1455.23,-2557.68 1425,-2587.91 1185,-2587.91 83.84,-2587.91 60.23,-2564.31 45.23,-2549.31 40.23,-2549.31
no net on Top Layer "GND" (solid, remove dead copper, pour order 86): 1615.47,-1995.71 1620.47,-1990.71 3008.84,-1990.71 3015.23,-1984.31 3030.47,-1999.54 3030.47,-2020.71 3030.47,-2559.07 3000.23,-2589.31 2760.23,-2589.31 1659.07,-2589.31 1635.47,-2565.71 1620.47,-2550.71 1615.47,-2550.71
no net on Top Layer "GND" (solid, remove dead copper, pour order 92): 40.23,-2640.77 45.23,-2635.77 1433.6,-2635.77 1440,-2629.37 1455.23,-2644.6 1455.23,-2665.77 1455.23,-3204.14 1425,-3234.37 1185,-3234.37 83.84,-3234.37 60.23,-3210.77 45.23,-3195.77 40.23,-3195.77
no net on Top Layer "GND" (solid, remove dead copper, pour order 94): 1615.47,-2642.16 1620.47,-2637.16 3008.84,-2637.16 3015.23,-2630.77 3030.47,-2646 3030.47,-2667.16 3030.47,-3205.53 3000.23,-3235.77 2760.23,-3235.77 1659.07,-3235.77 1635.47,-3212.16 1620.47,-3197.16 1615.47,-3197.16

## Keep-outs
Keep-Out Layer:
  lines w10: 1469.77,-603.6 1469.77,-38.6 1449.77,-18.6 34.77,-18.6 ; 1469.77,-593.6 1469.77,-623.6 1428.37,-665 66.16,-665 14.77,-613.6 14.77,-38.6 34.77,-18.6 ; 1470,-3194.37 1470,-2629.37 1450,-2609.37 35,-2609.37 15,-2629.37 15,-3204.37 66.4,-3255.77 ; 1470,-3184.37 1470,-3214.37 1428.6,-3255.77 66.4,-3255.77 ; 1470,-2547.91 1470,-1982.91 1450,-1962.91 35,-1962.91 15,-1982.91 15,-2557.91 66.4,-2609.31 1428.6,-2609.31 1470,-2567.91 1470,-2537.91 ; 1470,-1901.46 1470,-1336.46 1450,-1316.46 35,-1316.46 15,-1336.46 15,-1911.46 66.4,-1962.85 1428.6,-1962.85 1470,-1921.46 1470,-1891.46 ; 1470,-1255 1470,-690 1450,-670 35,-670 15,-690 15,-1265 66.4,-1316.4 1428.6,-1316.4 1470,-1275 1470,-1245 ; 3045,-605 3045,-40 3025,-20 ; 3045,-595 3045,-625 3003.6,-666.4 1641.4,-666.4 1590,-615 1590,-40 1610,-20 3025,-20 ; 3045.23,-3195.77 3045.23,-2630.77 3025.23,-2610.77 1610.23,-2610.77 1590.23,-2630.77 1590.23,-3205.77 1641.63,-3257.16 3003.84,-3257.16 ; 3045.23,-3185.77 3045.23,-3215.77 3003.84,-3257.16 ; 3045.23,-2549.31 3045.23,-1984.31 3025.23,-1964.31 1610.23,-1964.31 1590.23,-1984.31 1590.23,-2559.31 1641.63,-2610.71 3003.84,-2610.71 3045.23,-2569.31 3045.23,-2539.31 ; 3045.23,-1902.85 3045.23,-1337.85 3025.23,-1317.85 1610.23,-1317.85 1590.23,-1337.85 1590.23,-1912.85 1641.63,-1964.25 3003.84,-1964.25 3045.23,-1922.85 3045.23,-1892.85 ; 3045.23,-1256.4 3045.23,-691.4 3025.23,-671.4 1610.23,-671.4 1590.23,-691.4 1590.23,-1266.4 1641.63,-1317.79 3003.84,-1317.79 3045.23,-1276.4 3045.23,-1246.4 ; 34.77,-18.6 34.77,-16.77 11,7 11,96 11,216 3045,216 3045,0 3025,-20 ; 66.4,-3255.77 66.4,-3266.6 14,-3319 14,-3482 53,-3521 90,-3521 2961,-3521 3015,-3521 3048,-3488 3048,-3301.32 3003.84,-3257.16

## Silkscreen, mask and mechanical layers (free items; w line width, h text height)
Top Overlay:
  region: 2280.23,-151.4 2300.23,-131.4 3005.23,-131.4 3005.23,-141.4 3015.23,-151.4 3015.23,-576.4 2990.23,-601.4 2780.23,-601.4 2755.23,-576.4 2300.23,-576.4 2280.23,-556.4
  region: 705,-150 725,-130 1430,-130 1430,-140 1440,-150 1440,-575 1415,-600 1205,-600 1180,-575 725,-575 705,-555
  region: 705.23,-801.4 725.23,-781.4 1430.23,-781.4 1430.23,-791.4 1440.23,-801.4 1440.23,-1226.4 1415.23,-1251.4 1205.23,-1251.4 1180.23,-1226.4 725.23,-1226.4 705.23,-1206.4
  region: 2280.47,-802.79 2300.47,-782.79 3005.47,-782.79 3005.47,-792.79 3015.47,-802.79 3015.47,-1227.79 2990.47,-1252.79 2780.47,-1252.79 2755.47,-1227.79 2300.47,-1227.79 2280.47,-1207.79
  region: 705.23,-1447.85 725.23,-1427.85 1430.23,-1427.85 1430.23,-1437.85 1440.23,-1447.85 1440.23,-1872.85 1415.23,-1897.85 1205.23,-1897.85 1180.23,-1872.85 725.23,-1872.85 705.23,-1852.85
  region: 2280.47,-1449.25 2300.47,-1429.25 3005.47,-1429.25 3005.47,-1439.25 3015.47,-1449.25 3015.47,-1874.25 2990.47,-1899.25 2780.47,-1899.25 2755.47,-1874.25 2300.47,-1874.25 2280.47,-1854.25
  region: 705.23,-2094.31 725.23,-2074.31 1430.23,-2074.31 1430.23,-2084.31 1440.23,-2094.31 1440.23,-2519.31 1415.23,-2544.31 1205.23,-2544.31 1180.23,-2519.31 725.23,-2519.31 705.23,-2499.31
  region: 2280.47,-2095.71 2300.47,-2075.71 3005.47,-2075.71 3005.47,-2085.71 3015.47,-2095.71 3015.47,-2520.71 2990.47,-2545.71 2780.47,-2545.71 2755.47,-2520.71 2300.47,-2520.71 2280.47,-2500.71
  region: 705.23,-2740.77 725.23,-2720.77 1430.23,-2720.77 1430.23,-2730.77 1440.23,-2740.77 1440.23,-3165.77 1415.23,-3190.77 1205.23,-3190.77 1180.23,-3165.77 725.23,-3165.77 705.23,-3145.77
  region: 2280.47,-2742.16 2300.47,-2722.16 3005.47,-2722.16 3005.47,-2732.16 3015.47,-2742.16 3015.47,-3167.16 2990.47,-3192.16 2780.47,-3192.16 2755.47,-3167.16 2300.47,-3167.16 2280.47,-3147.16

## Dimensions
43,277 to 99,-3596 on Top Overlay
-67,276 to 3116,245 on Top Overlay